# Altium PCB EE3102_Project.PcbDoc
Units mil, origin at the board's own origin, x right, y up, seen from the top; angles counter-clockwise.
Board outline 3000 x 2000 mil, 2 copper layers (Top Layer, Bottom Layer); 20 components, 20 nets, 96 pads, 0 vias.
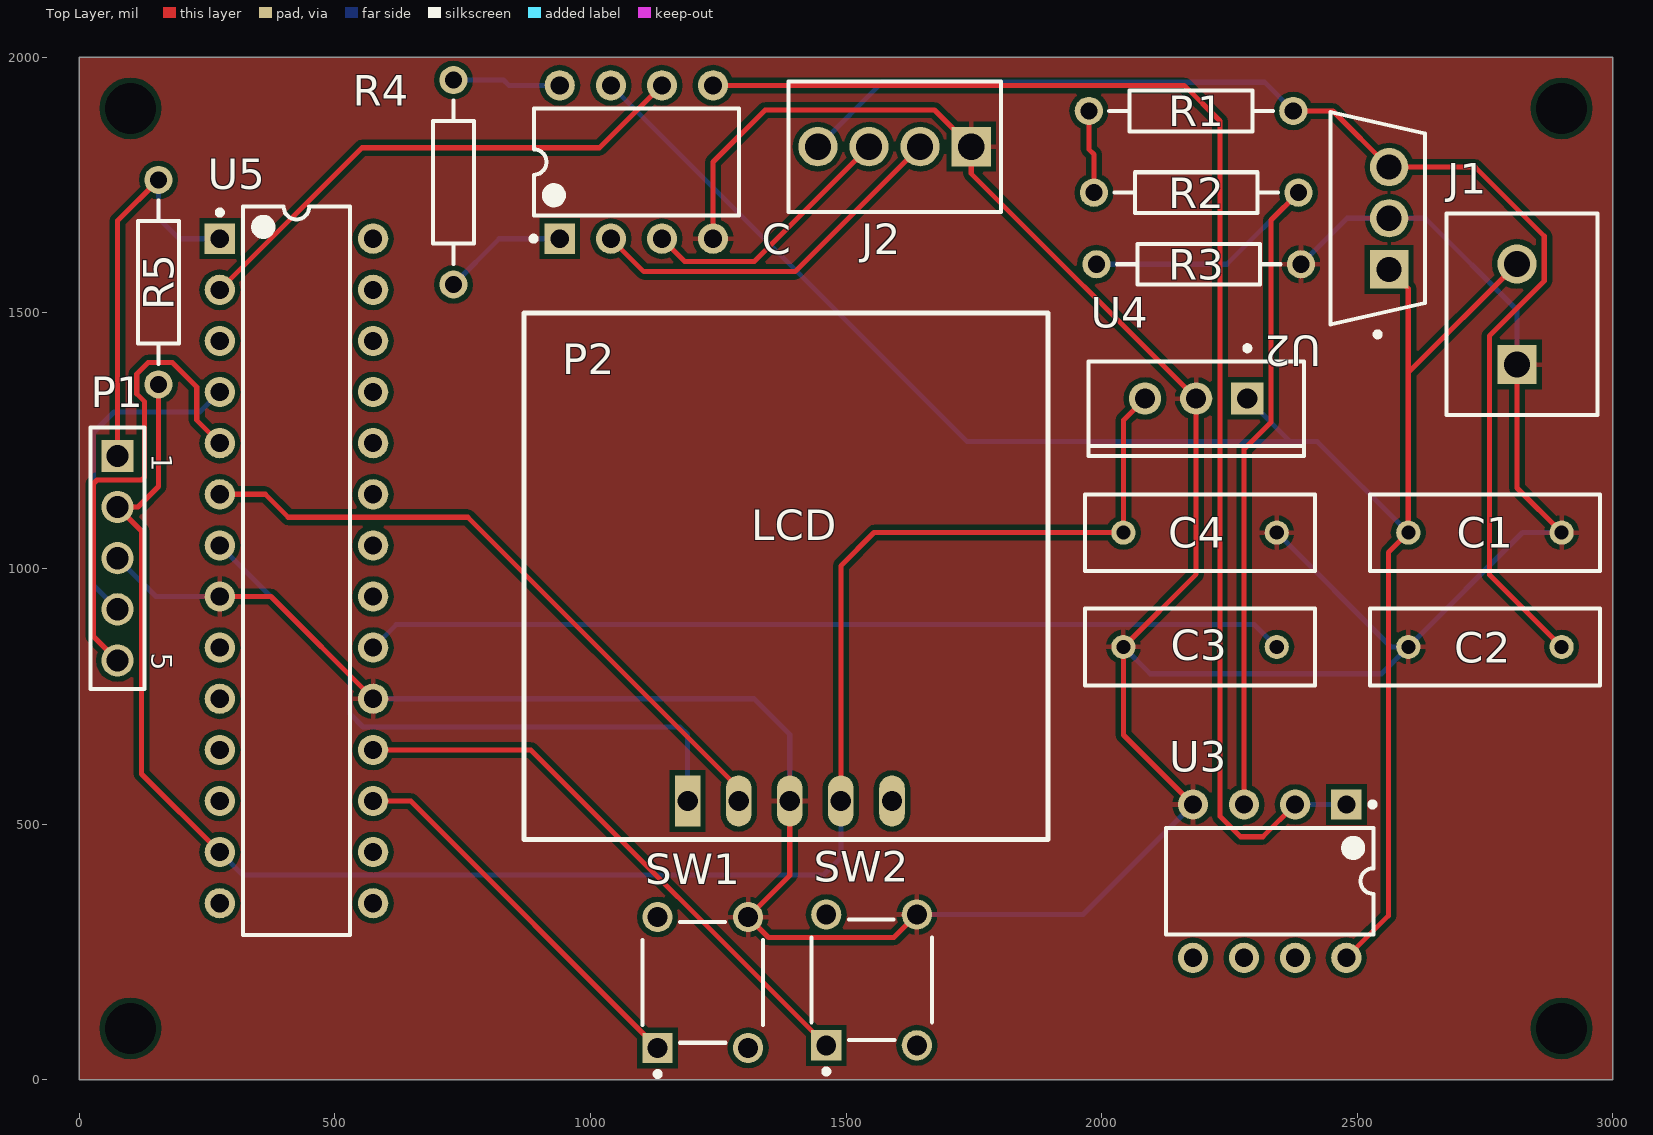
[diagram p0: Top Layer view]
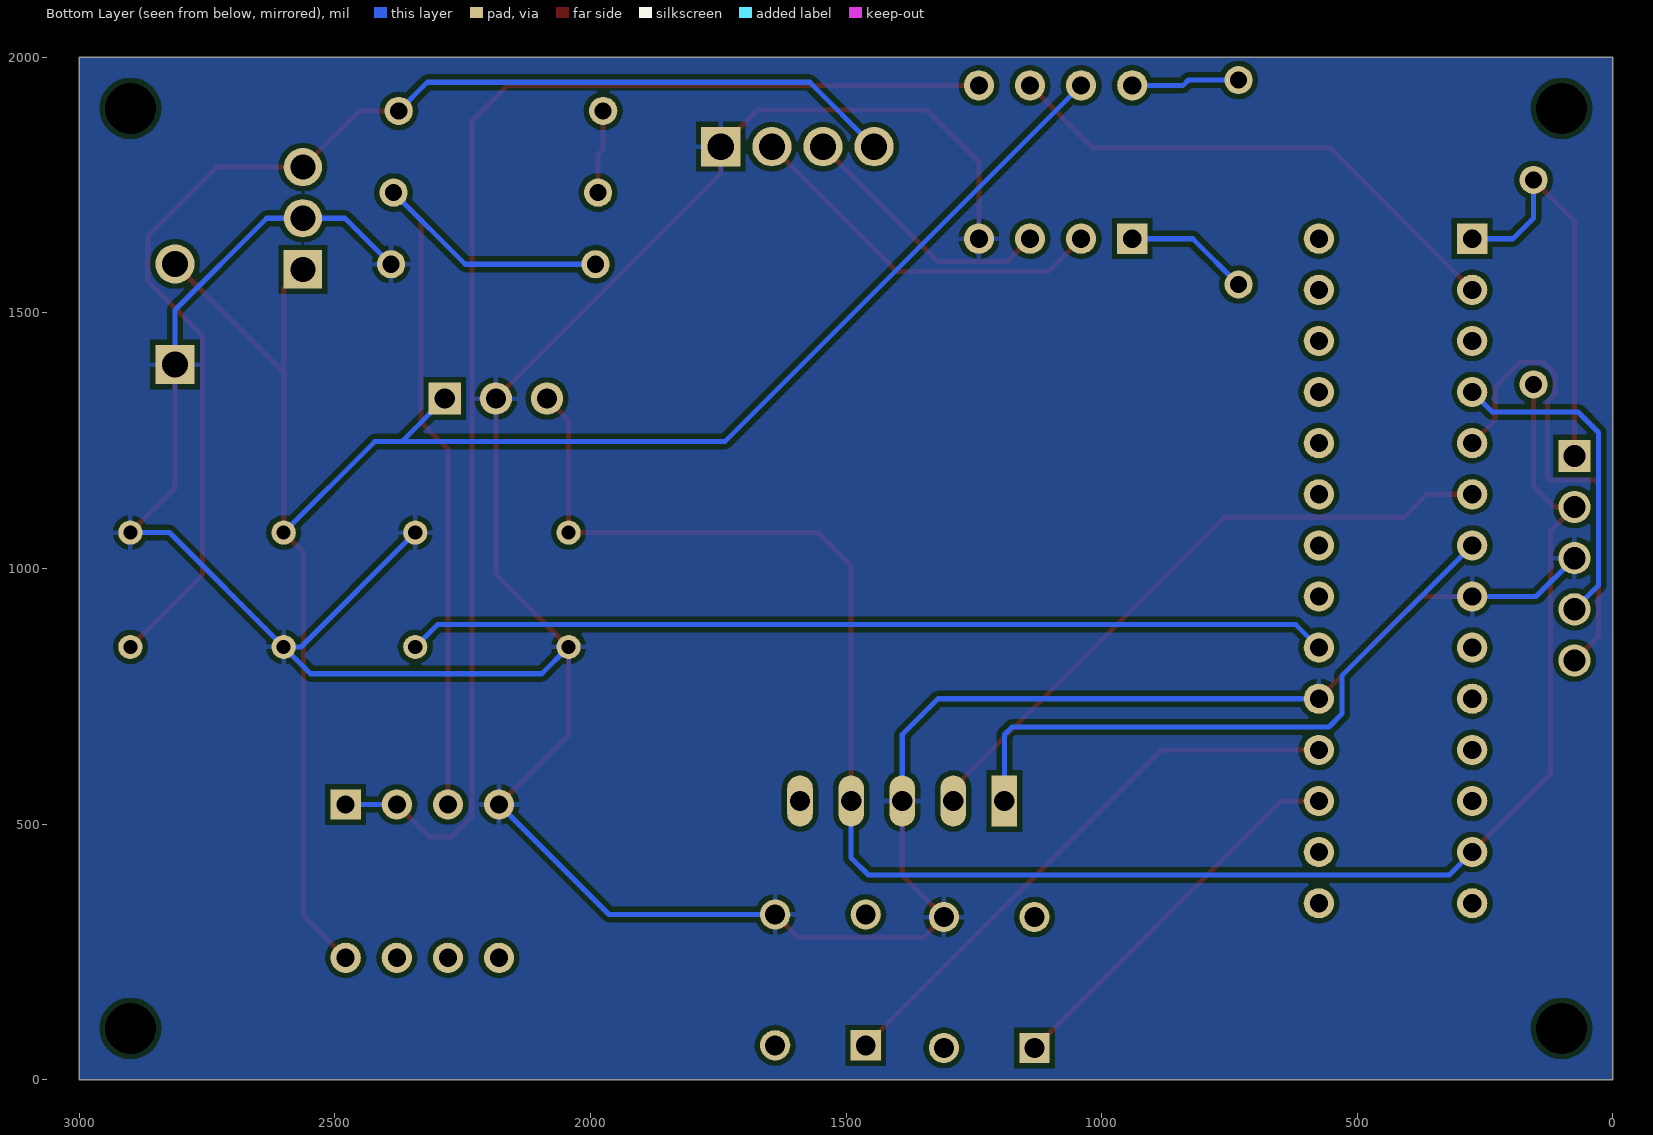
[diagram p1: Bottom Layer view, seen from below]

## Layer stack, top to bottom
Top Solder: solder mask 0.4, Solder Resist, Dk 3.5
Top Layer: signal copper 1.4
Dielectric 1: dielectric 12.6, FR-4, Dk 4.8
Bottom Layer: signal copper 1.4
Bottom Solder: solder mask 0.4, Solder Resist, Dk 3.5

## Board outline
0,0 3000,0 3000,2000 0,2000

## Design rules (kind name [scope] priority, off if disabled: settings)
Clearance [All] p1: gap=10 ignorepadtopadclearanceinfootprint=FALSE except(0: Arc-Hole Track-Hole SMDPad-Hole THPad-Hole Via-Hole Fill-Hole Poly-Hole Region-Hole Text-Hole)
PolygonConnect [All] p1: connectstyle=Relief reliefconductorwidth=10 reliefentries=4 polygonreliefangle="90 Angle" airgapwidth=10
RoutingVias [All] p1: holewidth=28 width=50 viastyle="Through Hole" minholewidth=28 minwidth=50 maxholewidth=28 maxwidth=50
SolderMaskExpansion [All] p1: expansion=4 istentingtop=FALSE
Width [All] p1: maxlimit=10 minlimit=10 preferedwidth=10
30 further rules are at their usual default settings.

## Classes and differential pairs
component class EE3102_Project: C C1 C2 J1 J2 R1 R2 R3 R4 U2 U3 U4
component class EE3102_Project_2: C3 C4 P1 P2 R5 SW1 SW2 U5

## Components (designator, comment, footprint, x,y, rotation, side; value= is the part's Value field where it differs from the comment)
C "INA121P" P0008A 1090,1795 r90 top (schematic designator U1)
C1 "Cap" RAD-0.3 2750,1070 r180 top value=330nF
C2 "Cap" RAD-0.3 2750,846.4 r0 top value=0.10uF
C3 "Cap" RAD-0.3 2192.62,846.4 r180 top value=10uF
C4 "Cap" RAD-0.3 2192.62,1070 r0 top value=10uF
J1 "691137710002" 691137710002 2822.44,1497.19 r90 top
J2 "691210910004" 691210910004 1595,1825 r180 top
P1 "Programming Header" 61300511121 75,1020 r270 top
P2 "LCD" LCD_5_Pin 940,965 r0 top
R1 "Res2" AXIAL-0.4 2175,1895 r0 top value=200k
R2 "Res2" AXIAL-0.4 2185,1735 r180 top value=200k
R3 "Res2" AXIAL-0.4 2190,1595 r180 top value=100k
R4 "Res2" AXIAL-0.4 732.09,1755.37 r270 top value=7.5k
R5 "Res2" AXIAL-0.4 155,1560 r270 top value=10k
SW1 "1825910-6" TECO-1825910-6_V 1220,190 r90 top
SW2 "1825910-6" TECO-1825910-6_V 1550,195 r90 top
U2 "LM2937ET-5.0/NOPB" FP-NDE0003B-MFG 2540,1685 r180 top
U3 "LMC662CN" N08E 2328.73,388.25 r270 top
U4 "LM2937ET-3.3/NOPB" NDE0003A 2185,1332.27 r180 top
U5 "PIC24FJ64GA002-I/SP" SPDIP300-SP28 425,995 r0 top

## Footprints (in the part's own frame and the unit in brackets; to place one, negate y for a bottom-side part, rotate by r counter-clockwise, add the part's x,y. Pads: shape width x height; smd on the part's side, far side on the other; paste and mask are expansions set on the pad)
61300511121 [mm] "Pin Header, pitch 2.54 mm, THT, Vertical, single row, 5p"
  rect 1.6x1.6 hole 1.1: 1(-5.08,0)
  round 1.6 hole 1.1: 2(-2.54,0) 3(0,0) 4(2.54,0) 5(5.08,0)
  silkscreen extent -6.5,-1.34 6.5,1.34, body extent -6.35,-1.27 6.35,1.27, height 8.57
691137710002 [mm] "Horizontal Cable Entry with Pressure Clamp, pitch 5mm, 02p"
  rect 1.95x1.95 hole 1.3: 1(-2.5,0.25)
  round 1.95 hole 1.3: 2(2.5,0.25)
  silkscreen extent -5,-3.75 5,3.75, body extent -5,-3.75 5,3.75, height 11.6
691210910004 [mm] "2,54mm - modular - green - Horizontal wire entry - Cage clamp - 0,8mm2 wires - 04p"
  rect 1.95x1.95 hole 1.3: 1(-3.81,0)
  round 1.95 hole 1.3: 2(-1.27,0) 3(1.27,0) 4(3.81,0)
  silkscreen extent -5.28,-3.25 5.28,3.25, body extent -5.28,-3.25 5.28,3.25, height 8.55
AXIAL-0.4 [mm] "Axial Device, Thru-Hole; 2 Leads; 0.4 in Pin Spacing"
  round 1.4 hole 0.85: 1(-5.08,0) 2(5.08,0)
  silkscreen extent -4.06,-1.02 4.06,1.02
FP-NDE0003B-MFG [mm]
  rect 1.9x1.9 hole 1.25 paste-1000 mask+0: 1(-0.573,2.54)
  round 1.9 hole 1.25 paste-1000 mask+0: 2(-0.573,0) 3(-0.573,-2.54)
  silkscreen extent -2.35,-5.27 2.35,5.89, body extent -2.45,-5.37 2.45,5.37, height 0.25
LCD_5_Pin [mil]
  rect 50x100 hole 40: 1(250,-420)
  oval 50x100 hole 40: 2(350,-420) 3(450,-420) 4(550,-420) 5(650,-420)
  silkscreen extent -70,-495 955,535
N08E [mm] "DIP, 8-Pin, Row Spacing 7.62 mm, Pitch 2.54 mm"
  rect 1.5x1.5 hole 0.9: 1(-3.81,3.81)
  round 1.5 hole 0.9: 2(-3.81,1.27) 3(-3.81,-1.27) 4(-3.81,-3.81) 5(3.81,-3.81) 6(3.81,-1.27) 7(3.81,1.27) 8(3.81,3.81)
  silkscreen extent -3.93,-5.15 2.65,5.24, body extent -3.6,-5.15 3.6,5.15, height 5.33
NDE0003A [mm] "FM, 3-Leads, Body 10.7x4.7mm, Pitch 2.54mm"
  rect 1.6x1.6 hole 1: 1(-2.54,0)
  round 1.6 hole 1: 2(0,0) 3(2.54,0)
  silkscreen extent -5.35,-2.62 5.35,2.85, body extent -5.4,-1.9 5.4,2.9, height 19.4
P0008A [mm] "DIP, 8-Leads, Body 10.15x6.6mm, Pitch 2.54mm"
  rect 1.5x1.5 hole 0.9: 1(-3.81,3.81)
  round 1.5 hole 0.9: 2(-3.81,1.27) 3(-3.81,-1.27) 4(-3.81,-3.81) 5(3.81,-3.81) 6(3.81,-1.27) 7(3.81,1.27) 8(3.81,3.81)
  silkscreen extent -3.93,-5.1 2.65,5.23, body extent -3.95,-5.07 3.95,5.07, height 5.08
RAD-0.3 [mm] "Radial Cap, Thru-Hole; 2 Leads; 0.3 in Pin Spacing"
  round 1.2 hole 0.7: 1(-3.81,0) 2(3.81,0)
  silkscreen extent -5.71,-1.91 5.71,1.91
SPDIP300-SP28 [mm] "DIP, 28-Pin, Row Spacing 7.62 mm, Pitch 2.54 mm"
  rect 1.5x1.5 hole 0.9: 1(-3.81,16.51)
  round 1.5 hole 0.9: 2(-3.81,13.97) 3(-3.81,11.43) 4(-3.81,8.89) 5(-3.81,6.35) 6(-3.81,3.81) 7(-3.81,1.27) 8(-3.81,-1.27) 9(-3.81,-3.81) 10(-3.81,-6.35) 11(-3.81,-8.89) 12(-3.81,-11.43) 13(-3.81,-13.97) 14(-3.81,-16.51) 15(3.81,-16.51) 16(3.81,-13.97) 17(3.81,-11.43) 18(3.81,-8.89) 19(3.81,-6.35) 20(3.81,-3.81) 21(3.81,-1.27) 22(3.81,1.27) 23(3.81,3.81) 24(3.81,6.35) 25(3.81,8.89) 26(3.81,11.43) 27(3.81,13.97) 28(3.81,16.51)
  silkscreen extent -3.93,-18.1 2.65,18.1, body extent -3.55,-18.1 3.55,18.1, height 5.33
TECO-1825910-6_V [mm] "Switch, 4-Leads, Body 5.99x5.99mm"
  rect 1.5x1.5 hole 0.99: 1(-3.25,2.25)
  round 1.5 hole 0.99: 2(3.25,2.25) 3(-3.25,-2.25) 4(3.25,-2.25)
  silkscreen extent -4.67,-3 3,3, body extent -3,-2.99 2.99,3, height 5

## Part data
C: library part CMP-0992-00127-2, "FET-Input, Low Power Instrumentation Amplifier, -40 to 85 degC, 8-pin DIP (P8), Green (RoHS & no Sb/Br)", Input Bias Current (+/-)(Max)(nA)=0.05, Manufacturer="Texas Instruments", Quiescent Current (+/-)(Typ)(mA)=0.45, CMRR(Min)(dB)=96, Code_JEDEC=MS-001, ComponentLink1Description="Manufacturer URL", ComponentLink1URL=http://www.ti.com/, ComponentLink2Description=Datasheet, ComponentLink2URL=http://www.ti.com/general/docs/lit/getliterature.tsp?genericPartNumber=INA121&fileType=pdf, ComponentLink3Description="Package Specification", ComponentLink3URL=http://www.ti.com/litv/pdf/mpdi001b, DatasheetVersion=SBOS078, Eco-Plan="Green (RoHS & no Sb/Br)", Gain(V/V)="1 to 10000", Input Offset (+/-)(Max)(uV)=500, Input Offset Drift (+/-)(Max)(uV/Degrees Celsius)=5, Mounting Technology="Through Hole", Noise at 1kHz(Typ)(nV/rt(Hz))=20, Non-Linearity (+/-)(Max)(%)=0.005, Number of Channels=1, Output Offset (+/-)(Max)(uV)=500/G, Output Offset Drift (+/-)(Max)(uV/Degrees Celsius)=20/G, PackageDescription="8-Pin Plastic In-Line, Body 9.59 x 6.35 mm, Pitch 2.54 mm", PackageReference=P0008A, PackageVersion="4040082/E, 04/2010", PartNumber=INA121P, SubFamily="Dual Supply", Vs(Max)(V)=36, Vs(Min)(V)=4.5
C1 C2 C3 C4: "Capacitor", LatestRevisionDate=17-Jul-2002, LatestRevisionNote="Re-released for DXP Platform.", PackageDescription="Radial Cap, Thru-Hole; 2 Leads; 0.3 in Pin Spacing", PackageReference=RAD-0.3, Published=8-Jun-2000, Publisher="Altium Limited"
J1: library part CMP-1502-03324-1, "Series 1377 - 5.00 mm Horizontal Entry with Pressure Clamp WR-TBL, 2 pin", Manufacturer="Wurth Elektronik", Operating Temperature=-30to120degC, Datasheet URL=http://katalog.we-online.de/pbs/datasheet/691137710002.pdf, Manufacturer URL=http://www.we-online.de, Mounting Technology=THT, Package Reference=691137710002, Packaging=Box, Part Number=691137710002, Pin Number=2, Pitch=5.00mm, Publisher=WurthElektronik
J2: library part CMP-1502-02458-1, "Serie 2109 - 2.54 mm Horizontal Entry with Rising Cage Clamp WR-TBL, 4 pin", Manufacturer="Wurth Elektronik", Operating Temperature=-40to105degC, Datasheet URL=http://katalog.we-online.de/em/datasheet/6912109100xx.pdf, Manufacturer URL=http://www.we-online.de, Mounting Technology=THT, Package Reference=691210910004, Packaging=Box, Part Number=691210910004, Pin Number=4, Pitch=2.54mm, Publisher=WurthElektronik
P1: library part CMP-1502-01068-1, "THT Vertical Pin Header WR-PHD, Pitch 2.54 mm, Single Row, 5 pins", Contact Resistance=20mOhm, Manufacturer="Wurth Elektronik", Operating Temperature=-40to105degC, Package Reference=61300511121, Rated Current=3A, Withstanding Voltage=500VAC, Working Voltage=250VAC, Datasheet URL=https://katalog.we-online.de/em/datasheet/6130xx11121.pdf, Gender=Male, Manufacturer URL=http://www.we-online.de, Mounting Technology=THT, Orientation=Vertical, Packaging=Bag, Part Number=61300511121, Pin Number=5, Pitch=2.54mm, Publisher=WurthElektronik, Row Number=Single
P2: library part WE-CN-1P-M-R5, "THT Vertical Pin Header WR-PHD, Pitch 2.54 mm, Single Row, 5 pins", Contact Resistance=20mOhm, Manufacturer="Wurth Elektronik", Operating Temperature=-40to105degC, Package Reference=61300511121, Rated Current=3A, Withstanding Voltage=500VAC, Working Voltage=250VAC, Datasheet URL=https://katalog.we-online.de/em/datasheet/6130xx11121.pdf, Gender=Male, Manufacturer URL=http://www.we-online.de, Mounting Technology=THT, Orientation=Vertical, Packaging=Bag, Part Number=61300511121, Pin Number=5, Pitch=2.54mm, Publisher=WurthElektronik, Row Number=Single
R1 R2 R3 R4 R5: "Resistor", LatestRevisionDate=17-Jul-2002, LatestRevisionNote="Re-released for DXP Platform.", PackageDescription="Axial Device, Thru-Hole; 2 Leads; 0.4 in Pin Spacing", PackageReference=AXIAL-0.4, Published=8-Jun-2000, Publisher="Altium Limited"
SW1 SW2: library part CMP-1684-00021-1, "Tact Switch, SPST-NO, 0.05 A, -35 to 85 degC, 4-Pin THD, RoHS, Bulk", Actuator Color=Black, Contact Rating @ Voltage=0.05A@24VDC, Dielectric Strength=500VAC, Manufacturer="TE Connectivity", Maximum AC Voltage Rating=N/A, Maximum Contact Resistance=100mOhm, Maximum DC Voltage Rating=24V, Minimum Insulation Resistance=100MOhm, Operating Temperature=-35to85C, Package Description="4-Pin Through Hole Device, Body 5.99 x 5.99 mm, Pitch 6.5 mm", Package Reference=THD, Actuator Length=1.4mm, Actuator Material=PolybutyleneTerephthalate, Actuator Style=RoundButton, Base Material=N/A, Body Orientation=Straight, Bushing Type=Unthreaded, Contact Material=CopperAlloy, Contact Plating=Silver, Datasheet URL=http://www.te.com/commerce/DocumentDelivery/DDEController?Action=showdoc&DocId=Customer+Drawing%7F1825910%7FC9%7Fpdf%7FEnglish%7FENG_CD_1825910_C9.pdf%7F1825910-6, Datasheet Version="Rev. C9", Dimension=5.99x5mm, Electrical Life=100000Cycles, Family=1825910, Function=MomentaryContact, Housing Material=N/A, Illumination=N/R, Manufacturer URL=http://www.te.com, Mechanical Life=100000Cycles, Mounting=ThroughHole, Packaging=N/A, Part No=1825910-6, Pole Throw Configuration=SPST, Product Weight=N/A, RoHS=Yes, Seal Description=N/A, Seal Location=N/A, Switch Configuration=OFF(ON), Terminal Type=PCPins, Thread Size=N/R
U2: library part CMP-0062-02519-4, "IC REG LINEAR 5V 500MA TO220-3", Dropout Voltage=0.5V, Manufacturer="Texas Instruments", Max Junction Temp=+125°C, Max Supply Voltage=26V, Min Supply Voltage=6V, Nominal Supply Current=2-10mA, Output Current=500mA, Output Voltage=5V, Package=NDE0003B, Temperature="-40°C to +125°C", Temperature Range Low=-40°C, Accuracy Percentage=5%, Automotive=No, Category=IC, ComponentLink2Description=Datasheet, ComponentLink2URL=http://www.ti.com/lit/ds/symlink/lm2937.pdf, Device Class L1="Integrated Circuits (ICs)", Device Class L2="Power Management ICs", Device Class L3="Voltage Regulators - Linear", Digikey Description="IC REG LINEAR 5V 500MA TO220-3", Height=19.55mm, Ipc Land Pattern Name=TO-220, Lead Free=Yes, Manufacturer Part Number=LM2937ET-5.0/NOPB, Number Of Outputs=1, Octopart=https://octopart.com/lm2937et-5.0%2Fnopb-texas+instruments-24813532, Output Type=Fixed, RoHS=TRUE, Standoff Height=3.3mm, Temperature Range High=+125°C
U3: library part CMP-0055-00172-2, "CMOS Dual Operational Amplifier, 8-pin MDIP", Manufacturer="National Semiconductor", PackageTopMarking=NSUZXYTTE#*LMC*662CN, PowerWise=N, Code_JEDEC=MS-001-BA, ComponentLink1Description="LMC662 Datasheet", ComponentLink1URL=http://www.national.com/ds/LM/LMC662.pdf, ComponentLink2Description="LMC662 Web Page", ComponentLink2URL=http://www.national.com/pf/LM/LMC662.html, ComponentLink3Description="N08E Package Page", ComponentLink3URL=http://www.national.com/packaging/folders/n08e.html, CompType=Amplifiers, DatasheetVersion=Apr-2003, PackageDescription="MDIP, .365 x .250 x .130in, 8 Lead, .100in Pitch", PackageReference=N08E, PackageVersion="revG, May-2006", PinCount=8, RevisionNote="Component URLs added", RoHS=N
U4: library part CMP-0062-02520-3, "400mA and 500mA Voltage Regulator, 3-pin TO-220, Pb-Free", Manufacturer="Texas Instruments", PackageTopMarking=NSUZXYTTE#*LM2937ET*-3.3, PowerWise=N, ComponentLink1Description="Datasheet URL", ComponentLink1URL=http://www.ti.com/general/docs/lit/getliterature.tsp?genericPartNumber=LM2937-3.3&fileType=pdf, CompType="LDO IC", PackageDescription="TO-220, Molded, 3 Lead, Straight", PackageReference=NDE0003A, PinCount=3, RoHS=Y
U5: library part CMP-0046-00003-2, "General Purpose 16-Bit Flash Microcontroller, 64KB Flash, 8KB SRAM, 28-Pin SPDIP, Industrial Temperature", ComponentLink1Description=Datasheet, ComponentLink1URL=http://ww1.microchip.com/downloads/en/DeviceDoc/39881D.pdf, ComponentLink2Description="Packaging Specification", ComponentLink2URL=http://www.microchip.com/stellent/groups/techpub_sg/documents/packagingspec/en012702.pdf, ComponentLink3Description="Microchip.com Home", ComponentLink3URL=http://www.microchip.com/, DatasheetVersion="revD, Feb-2010", PackageDescription="28-Lead Skinny Plastic Dual In-Line (SP) - 300 mil Body [SPDIP]", PackageReference=SPDIP300-SP28, PackageVersion="revBB, Aug-2009", RevisionNote="Component URLs added."

## Free pads (board coordinates)
  round 60 hole 100 unplated: 1(100,1900) 2(2900,1900) 3(2900,100) 4(100,100)

## Nets (pads, with @x,y where several pads share a name; then routed paths per layer and width w, separated by ;. In a path a pad name is that pad's centre, name@x,y a point inside that pad or via, vN(x,y) a via of type N, cw(c..) or ccw(c..) an arc to the next point about the centre after c; other vN are vias at no path point)
9V: C1.2 C.7 J1.2 U2.1 U3.8 U4.1 | length 3754.8
  Top Layer w10: U3.8 2561,320.51 2561,1031 C1.2 2600,1383.02 ; U2.1 2600,1547.54 2600,1383.02 ; J1.2 2600,1383.02
  Bottom Layer w10: C.7 1737,1248 2369.27,1248 ; U4.1 2369.27,1248 ; C1.2 2422,1248 2369.27,1248
+5: C2.2 J2.4 R1.2 U2.3 | length 2504.2
  Top Layer w10: R1.2 2452.54,1895 U2.3 2731,1785 2866,1650 2866,1562 2759,1455 2759,987.4 C2.2
  Bottom Layer w10: J2.4 1571,1951 2319,1951 R1.2
GND: C1.1 C2.1 C3.2 C4.2 C.4 J1.1 J2.1 P1.3 P2.3 R3.1 SW1.4 SW2.4 U2.2 U3.4 U4.2 U5.8 U5.19 | length 7504
  Top Layer w10: U5.8 375,945 U5.19 ; C.4 1240,1795 1342,1897 1673,1897 J2.1 1745,1772.27 U4.2 2185,988.78 C3.2 2042.62,674.36 U3.4 ; P2.3 1390,399.37 SW1.4 1348.53,278 1593.63,278 SW2.4 ; J1.1 2812.6,1157.4 C1.1
  Bottom Layer w10: P1.3 150,945 U5.8 ; U5.19 1320,745 1390,675 P2.3 ; SW2.4 1963.44,322.95 U3.4 ; C3.2 2095.02,794 2547.6,794 C2.1 ; C4.2 2566.22,846.4 C2.1 ; R3.1 2480,1685 U2.2 2633.17,1685 2812.6,1505.57 J1.1 ; C1.1 2823.6,1070 C2.1
NetC3_1: C3.1 U5.20 | length 1804.3
  Bottom Layer w10: U5.20 620,890 2299.02,890 C3.1
NetC4_1: C4.1 P1.2 P2.4 R5.2 U4.3 U5.13 | length 3732.5
  Top Layer w10: R5.2 155,1160 115,1120 P1.2 122,1073 122,598 U5.13 ; P2.4 1490,1005 1555,1070 C4.1 2042.62,1289.89 U4.3
  Bottom Layer w10: U5.13 320,400 1456,400 1490,434 P2.4
NetJ2_2: C.2 J2.2 | length 733
  Top Layer w10: C.2 1104.53,1580.47 1400.47,1580.47 J2.2
NetJ2_3: C.3 J2.3 | length 516.4
  Top Layer w10: C.3 1184.53,1600.47 1320.47,1600.47 J2.3
NetP1_1: P1.1 R5.1 U5.1 | length 784.7
  Top Layer w10: P1.1 75,1680 R5.1
  Bottom Layer w10: R5.1 155,1685 195,1645 U5.1
NetP1_4: P1.4 U5.4 | length 645.2
  Bottom Layer w10: P1.4 28,967 28,1266 68,1306 236,1306 U5.4
NetP1_5: P1.5 U5.5 | length 954.2
  Top Layer w10: P1.5 28,867 28,1166 35,1173 122,1173 128,1179 128,1326 112.44,1341.56 112.44,1380.44 135,1403 182,1403 230,1355 230,1290 U5.5
NetP2_1: P2.1 U5.7 | length 1242.2
  Bottom Layer w10: U5.7 530,790 530,715 555,690 1175,690 1190,675 P2.1
NetP2_2: P2.2 U5.6 | length 1278.2
  Top Layer w10: U5.6 364,1145 409,1100 760,1100 1290,570 P2.2
NetR1_1: R1.1 R2.2 | length 164.1
  Top Layer w10: R1.1 1975,1820 1985,1810 R2.2
NetR2_1: R2.1 R3.2 U3.3 | length 1693.8
  Top Layer w10: U3.3 2278.73,1233.01 2331.5,1285.77 2331.5,1681.5 R2.1
  Bottom Layer w10: R3.2 2245,1595 R2.1
NetR4_1: C.8 R4.1 | length 212.2
  Bottom Layer w10: R4.1 830,1955.37 840.37,1945 C.8
NetR4_2: C.1 R4.2 | length 245
  Bottom Layer w10: R4.2 821.72,1645 C.1
NetSW1_1: SW1.1 U5.17 | length 756.5
  Top Layer w10: U5.17 648.47,545 SW1.1
NetSW2_1: SW2.1 U5.18 | length 1125.8
  Top Layer w10: U5.18 883.47,645 SW2.1
NetU1_5: C.5 U3.1 U3.2 | length 2670.5
  Top Layer w10: C.5 2161.5,1945 2231.5,1875 2231.5,515 2271.5,475 2315.49,475 U3.2
  Bottom Layer w10: U3.2 U3.1
NetU1_6: C.6 U5.2 | length 1030.7
  Top Layer w10: U5.2 553,1823 1018,1823 C.6
pads on no net: P2.5 SW1.2 SW1.3 SW2.2 SW2.3 U3.5 U3.6 U3.7 U5.3 U5.9 U5.10 U5.11 U5.12 U5.14 U5.15 U5.16 U5.21 U5.22 U5.23 U5.24 U5.25 U5.26 U5.27 U5.28

## Polygon pours and split planes (outlines as drawn)
GND on Top Layer "GND_L01_P000" (solid, pour order 0): 0,0 3000,0 3000,2000 0,2000
GND on Bottom Layer "GND_L02_P001" (solid, pour order 1): 0,0 3000,0 3000,2000 0,2000

## Silkscreen, mask and mechanical layers (free items; w line width, h text height)
Mechanical 1:
  the board outline again, w10

## Text inside footprints (layer, text, board x,y; h text height)
P1: Top Overlay "1" at 141.93,1224.72 h40 r270; Top Overlay "5" at 141.93,834.96 h40 r270